# Altium PCB stm32f373-relay-control.PcbDoc (part 2 of 2)
Units mm, origin at the board's own origin, x right, y up, seen from the top; angles counter-clockwise.
Board outline 127.01 x 87.01 mm, 2 copper layers (Top Layer, Bottom Layer), stack 1.571 mm thick; 178 components, 124 nets, 682 pads, 208 vias.
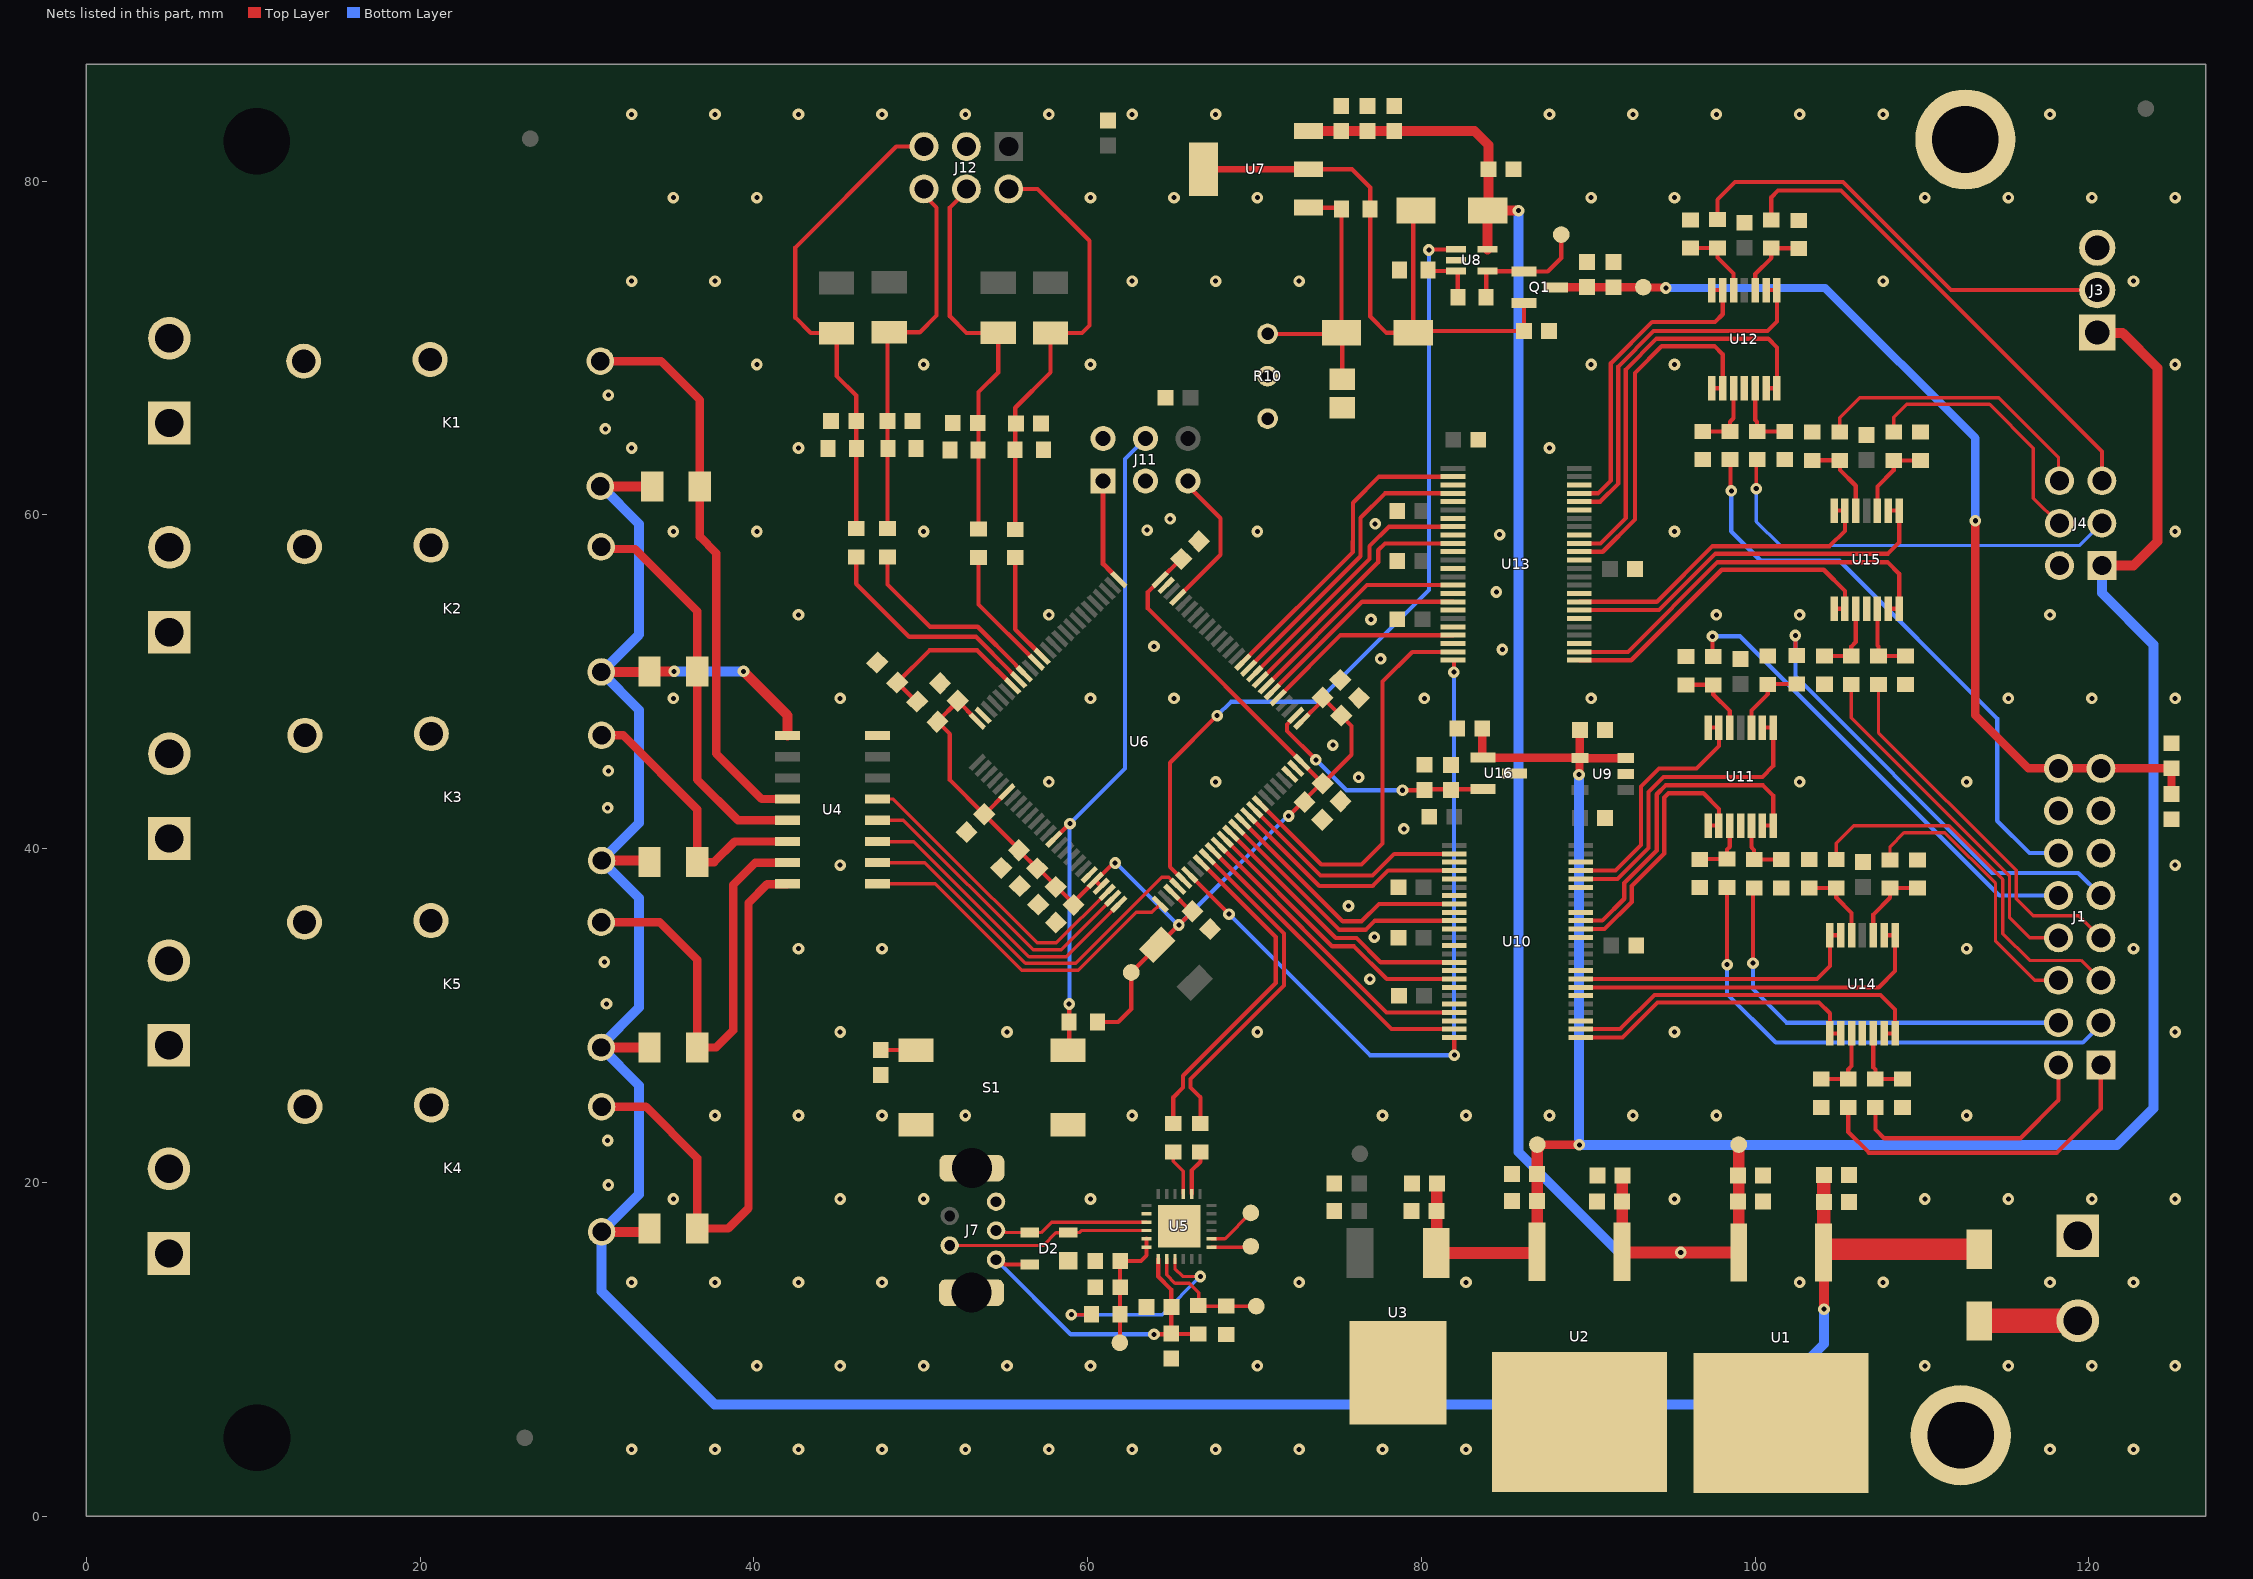
[diagram p2: the nets of this part, all layers, seen from the top]

## Via types
v1: diameter 0.7, hole 0.3, Top Layer to Bottom Layer, tented both sides, 207 vias
v2: diameter 0.7, hole 0.3, Top Layer to Bottom Layer, 1 vias

## Nets (pads, with @x,y where several pads share a name; then routed paths per layer and width w, separated by ;. In a path a pad name is that pad's centre, name@x,y a point inside that pad or via, vN(x,y) a via of type N, cw(c..) or ccw(c..) an arc to the next point about the centre after c; other vN are vias at no path point) (continued)
5V: C8.2 C9.1 C10.1 C11.2 C38.2 C56.2 J3.1 J4.1 TP2.1 U2.3 U3.1 U9.3 U9.4 U16.1 | length 142.7
  Top Layer w0.5: C56.2@83.653,47.197 83.653,45.492 U16.1@83.684,45.461 83.704,45.441 89.483,45.441 U9.4@89.502,45.422 ; TP2.1@87.153,22.254 v1(89.47,22.254) ; v1(89.45,44.436) 89.476,44.463 89.476,45.395 U9.4@89.503,45.421 ; C38.2@89.501,47.102 C38.2@89.501,47.102 U9.4@89.502,45.422 ; U9.3@92.253,45.421 U9.4@89.503,45.421 ; U9.4@89.502,45.422 U9.4@89.503,45.421
  Top Layer w0.6: J3.1@120.503,70.929 120.538,70.895 122.029,70.895 124.112,68.811 124.112,58.4 122.675,56.963 J4.1@120.78,56.963
  Top Layer w0.7: C11.2@80.931,19.929 80.931,15.808 U3.1@80.892,15.769 86.858,15.769 U2.3@86.939,15.85 86.945,15.855 86.945,22.263 87.053,22.154 TP2.1@87.153,22.254
  Bottom Layer w0.6: v1(89.45,44.436) 89.46,44.426 89.46,22.264 v1(89.47,22.254) 121.692,22.254 123.875,24.437 123.875,52.225 120.78,55.32 J4.1@120.78,56.963 ; J3.1@120.325,70.751 J3.1@120.503,70.929
5VFB: U12.13 U12.14 U13.39 | length 25.4
  Top Layer w0.25: U13.39@89.472,58.293 90.735,58.293 92.253,59.811 92.253,68.715 94.1,70.561 100.787,70.561 101.309,70.04 U12.14@101.309,67.593 U12.13@100.659,67.593
12V: C4.2 C5.1 C6.2 C7.1 C32.1 C33.1 C34.1 C37.1 D8.1 TP1.1 U1.3 U2.1 U7.3 U8.5 | length 105.8
  Top Layer w0.6: U7.3@73.241,83.011 73.244,83.008 78.375,83.008 C34.1@78.379,83.004 83.187,83.004 84.027,82.164 C37.1@84.027,80.711 84.027,78.285 D8.1@83.977,78.235 ; U8.5@83.977,75.913 D8.1@83.977,78.235 ; v1(85.823,78.235) D8.1@83.977,78.235
  Top Layer w0.7: U2.1@92.037,15.867 C7.1@92.037,20.399 ; U2.1@92.069,15.8 v1(95.544,15.8) U1.3@99.019,15.8 ; U1.3@99.019,15.8 TP1.1@99.019,22.268
  Bottom Layer w0.6: v1(85.823,78.235) 85.823,21.827 91.85,15.8 v1(95.544,15.8)
24V: C2.1 C3.2 D1.1 D3.1 D4.1 D5.1 D6.1 D7.1 K1.6 K2.6 K3.6 K4.6 K5.6 U1.1 U4.9 | length 179.6
  Top Layer w0.6: K1.6@30.8,61.713 33.883,61.713 D7.1@33.902,61.695 ; K5.6@30.85,28.088 D4.1@33.745,28.088 ; K2.6@30.85,50.588 33.706,50.588 D6.1@33.745,50.627 33.747,50.625 v1(35.225,50.625) ; K4.6@30.875,17.038 33.546,17.038 D3.1@33.745,17.238 ; K3.6@30.875,39.288 33.651,39.288 D5.1@33.745,39.194 ; v1(39.377,50.629) 42.015,47.991 U4.9@42.015,46.782 ; v1(104.125,12.4) 104.134,12.409 U1.1@104.134,17.336
  Top Layer w0.8: U1.1@104.099,15.8 104.117,15.817 104.117,20.419 C3.2@104.134,20.437
  Top Layer w1.3: U1.1@104.241,15.998 D1.1@113.434,15.998
  Bottom Layer w0.6: K1.6@30.8,61.713 30.87,61.713 33.125,59.459 33.125,52.825 30.888,50.588 K2.6@30.85,50.588 33.125,48.313 33.125,41.538 K3.6@30.875,39.288 33.125,37.038 33.125,30.475 30.85,28.2 K5.6@30.85,28.088 33.125,25.813 33.125,19.288 K4.6@30.875,17.038 30.875,13.475 37.65,6.7 100.5,6.7 104.125,10.325 v1(104.125,12.4) ; v1(35.225,50.625) 39.373,50.625 v1(39.377,50.629)
AUX1-IN: J4.3 R25.1 | length 25.6
  Top Layer w0.2: v1(100.069,61.573) 100.069,63.253 R25.1@100.122,63.306
  Bottom Layer w0.2: v1(100.069,61.573) 100.069,59.601 101.499,58.17 119.448,58.17 J4.3@120.78,59.503
AUX1-OUT: U13.32 U15.6 U15.7 | length 19.5
  Top Layer w0.25: U13.32@89.472,54.793 94.107,54.793 97.44,58.126 104.467,58.126 105.384,59.043 U15.6@105.384,60.256 U15.7@104.734,60.256
AUX2-IN: J4.5 R16.1 | length 29.6
  Top Layer w0.25: R16.1@100.972,77.681 100.99,77.7 100.972,77.719 100.972,79.036 101.368,79.433 105.147,79.433 120.78,63.799 J4.5@120.78,62.043
AUX2-OUT: U13.31 U15.1 U15.2 | length 23.4
  Top Layer w0.25: U13.31@89.472,54.293 94.244,54.293 97.627,57.676 107.963,57.676 108.634,58.347 U15.1@108.634,60.256 U15.2@107.984,60.256
AUX3-IN: J4.4 R32.1 | length 15.8
  Top Layer w0.2: R32.1@108.309,64.958 108.309,65.844 109.087,66.622 114.048,66.622 116.676,63.994 116.676,61.007 118.19,59.494 118.232,59.494 J4.4@118.24,59.503
AUX3-OUT: U13.26 U15.13 U15.14 | length 24.4
  Top Layer w0.25: U13.26@89.472,51.793 92.38,51.793 97.753,57.166 107.94,57.166 108.634,56.472 U15.14@108.634,54.38 U15.13@107.984,54.38
AUX4-IN: J4.6 R33.1 | length 17.4
  Top Layer w0.2: R33.1@105.082,64.973 105.082,65.831 106.273,67.022 114.592,67.022 118.181,63.433 118.181,62.102 J4.6@118.24,62.043
AUX4-OUT: U13.25 U15.8 U15.9 | length 20.4
  Top Layer w0.25: U13.25@89.472,51.293 92.577,51.293 98,56.716 104.115,56.716 105.384,55.447 U15.9@105.384,54.38 U15.8@104.734,54.38
CON-IO1: C61.2 D10.2 J12.2 R13.1 R49.1 | length 26.3
  Top Layer w0.254: J12.2@55.275,79.533 57,79.533 60.107,76.426 60.107,71.343 59.665,70.9 D10.2@57.784,70.9 57.784,68.543 55.665,66.423 R13.1@55.665,59.138
CON-IO2: C62.2 D11.2 J12.4 R46.1 R50.1 | length 23.6
  Top Layer w0.254: J12.4@52.735,79.533 52.735,79.418 51.745,78.428 51.745,71.901 52.742,70.904 D11.2@54.647,70.904 54.647,68.539 53.467,67.359 R46.1@53.467,59.143
CON-IO3: C63.2 D12.2 J12.6 R47.1 R51.1 | length 23
  Top Layer w0.254: R47.1@48.014,59.184 C63.2@48.014,65.636 48.014,70.847 D12.2@48.114,70.947 49.947,70.947 50.953,71.952 50.953,78.411 50.195,79.169 J12.6@50.195,79.533
CON-IO4: C64.2 D13.2 J12.5 R48.1 R52.1 | length 29.5
  Top Layer w0.254: R48.1@46.133,59.184 C64.2@46.133,65.63 46.133,67.156 44.961,68.327 D13.2@44.961,70.897 43.41,70.897 42.486,71.822 42.486,76.026 48.533,82.073 J12.5@50.195,82.073
DRIVE1: U4.5 U6.23 | length 18.6
  Top Layer w0.2: U4.5@47.415,42.972 48.365,42.972 51.69,39.646 56.984,34.353 58.134,34.353 U6.23@61.168,37.387
DRIVE2: U4.4 U6.24 | length 18.6
  Top Layer w0.2: U4.4@47.415,41.702 48.96,41.702 56.729,33.933 58.421,33.933 U6.24@61.521,37.034
DRIVE3: U4.3 U6.25 | length 18.6
  Top Layer w0.2: U4.3@47.415,40.432 47.425,40.422 49.588,40.422 56.487,33.523 58.718,33.523 U6.25@61.875,36.68
DRIVE4: U4.1 U6.26 | length 20.7
  Top Layer w0.2: U4.1@47.415,37.892 50.877,37.892 56.046,32.723 59.454,32.723 62.917,36.186 63.856,36.186 U6.26@64.35,36.68
DRIVE5: U4.2 U6.29 | length 22.9
  Top Layer w0.2: U4.2@47.415,39.162 50.238,39.162 56.277,33.123 59.288,33.123 64.447,38.283 64.869,38.283 U6.29@65.41,37.741
GND: C1.1 C2.2 C3.1 C4.1 C5.2 C6.1 C7.2 C8.1 C9.2 C10.2 C11.1 C12.2 C13.1 C14.1 C15.1 C16.1 C17.2 C18.1 C19.1 C20.1 C21.1 C22.1 C23.1 C24.1 C25.1 C26.1 C27.1 C28.1 C29.1 C30.1 C31.1 C32.2 C33.2 C34.2 C35.2 C36.2 C37.2 C38.1 C39.2 C40.2 C41.2 C42.2 C43.1 C44.1 C45.1 C46.1 C47.1 C48.1 C49.1 C50.1 C51.1 C52.1 C53.2 C54.2 C55.1 C56.1 C57.2 C58.2 C59.1 C60.1 C61.1 C62.1 C63.1 C64.1 D2.1 J1.11 J1.13 J1.14 J2.1 J3.3 J4.2 J7.5 J7.MP1 J7.MP2 J11.2 J11.3 J12.3 pad.MH@112.6,82.5 pad.MH@112.326,4.85 R2.2 R7.1 R10.2 R10.3 R12.2 R18.2 R19.2 R20.2 R21.2 R26.2 R27.2 R28.2 R29.2 R34.2 R35.2 R36.2 R37.2 R42.2 R43.2 R44.2 R45.2 R49.2 R50.2 R51.2 R52.2 S1.2 S1.2_1 U1.2 U2.2 U3.2 U4.8 U5.2 U5.25 U6.20 U6.48 U6.49 U6.74 U6.99 U8.2 U9.2 U10.3 U10.5 U10.7 U10.9 U10.11 U10.13 U10.16 U10.18 U10.20 U10.22 U10.27 U10.30 U10.33 U10.37 U10.40 U10.43 U10.46 U11.11 U12.11 U13.3 U13.5 U13.7 U13.9 U13.11 U13.13 U13.16 U13.18 U13.20 U13.22 U13.27 U13.30 U13.33 U13.37 U13.40 U13.43 U13.46 U14.11 U15.11 U16.3
  other v1: 32.675,4.009 37.675,4.009 42.675,4.009 47.675,4.009 52.675,4.009 57.675,4.009 62.675,4.009 67.675,4.009 72.675,4.009 77.675,4.009 82.675,4.009 117.675,4.009 122.675,4.009 40.175,9.009 45.175,9.009 50.175,9.009 55.175,9.009 60.175,9.009 70.175,9.009 110.175,9.009 115.175,9.009 120.175,9.009 125.175,9.009 32.675,14.009 37.675,14.009 42.675,14.009 47.675,14.009 72.675,14.009 82.675,14.009 102.675,14.009 107.675,14.009 117.675,14.009 122.675,14.009 35.175,19.009 45.175,19.009 50.175,19.009 60.175,19.009 95.175,19.009 110.175,19.009 115.175,19.009 120.175,19.009 125.175,19.009 31.281,19.846 31.236,22.51 37.675,24.009 42.675,24.009 47.675,24.009 52.675,24.009 62.675,24.009 77.675,24.009 82.675,24.009 87.675,24.009 92.675,24.009 97.675,24.009 112.675,24.009 45.175,29.009 55.175,29.009 70.175,29.009 95.175,29.009 125.175,29.009 31.17,30.702 76.909,32.184 31.036,33.211 42.675,34.009 47.675,34.009 112.675,34.009 122.675,34.009 77.181,34.692 75.637,36.567 45.175,39.009 125.175,39.009 78.951,41.186 31.236,42.447 57.675,44.009 67.675,44.009 102.675,44.009 112.675,44.009 76.241,44.27 31.281,44.667 74.691,46.198 35.175,49.009 45.175,49.009 60.175,49.009 65.175,49.009 80.175,49.009 90.175,49.009 115.175,49.009 120.175,49.009 125.175,49.009 77.564,51.371 84.851,51.939 63.977,52.121 76.985,53.737 42.675,54.009 57.675,54.009 97.675,54.009 102.675,54.009 117.675,54.009 84.495,55.377 84.697,58.814 35.175,59.009 40.175,59.009 50.175,59.009 70.175,59.009 95.175,59.009 125.175,59.009 63.566,59.085 77.23,59.466 64.947,59.761 32.675,64.009 42.675,64.009 87.675,64.009 31.103,65.159 31.281,67.179 40.175,69.009 50.175,69.009 60.175,69.009 90.175,69.009 95.175,69.009 125.175,69.009 32.675,74.009 37.675,74.009 62.675,74.009 67.675,74.009 72.675,74.009 107.675,74.009 122.675,74.009 35.175,79.009 40.175,79.009 60.175,79.009 65.175,79.009 70.175,79.009 90.175,79.009 95.175,79.009 110.175,79.009 115.175,79.009 120.175,79.009 125.175,79.009 32.675,84.009 37.675,84.009 42.675,84.009 47.675,84.009 52.675,84.009 57.675,84.009 62.675,84.009 67.675,84.009 87.675,84.009 92.675,84.009 97.675,84.009 102.675,84.009 107.675,84.009 117.675,84.009
GPIO1: R13.2 U6.89 | length 6.6
  Top Layer w0.254: R13.2@55.665,57.438 55.665,53.143 U6.89@57.279,51.53
GPIO2: R46.2 U6.90 | length 7.7
  Top Layer w0.254: R46.2@53.467,57.443 53.467,54.634 U6.90@56.925,51.176
GPIO3: R47.2 U6.92 | length 12.1
  Top Layer w0.254: R47.2@48.014,57.484 48.014,55.836 50.552,53.297 53.416,53.297 55.706,51.007 55.706,50.981 U6.92@56.218,50.469
GPIO4: R48.2 U6.93 | length 13.7
  Top Layer w0.254: R48.2@46.133,57.484 46.133,55.87 49.306,52.696 53.31,52.696 55.353,50.653 55.353,50.627 U6.93@55.864,50.115
NetC35_1: C35.1 D8.2 D9.1 Q1.2 R9.2 U7.2 U7.2_1 | length 36.9
  Top Layer w0.25: U7.2@73.241,80.711 75.844,80.711 76.935,79.62 76.935,71.884 77.907,70.912 D9.1@79.512,70.912 ; D8.2@79.677,78.235 79.512,78.069 D9.1@79.512,70.912 ; Q1.2@86.142,72.685 86.154,72.672 C35.1@86.154,71.011 79.611,71.011 D9.1@79.512,70.912
  Top Layer w0.4: U7.2_1@66.941,80.711 U7.2@73.241,80.711
NetC36_1: C36.1 D9.2 R9.1 R10.1 U7.1 | length 16.7
  Top Layer w0.25: R10.1@70.787,70.851 75.151,70.851 D9.2@75.212,70.912 D9.2@75.216,70.908 ; U7.1@73.241,78.411 75.141,78.411 R9.1@75.216,78.336 D9.2@75.216,70.908 ; C36.1@75.261,68.126 75.261,70.637 75.216,70.681 D9.2@75.216,70.908
NetD1_2: D1.2 J2.2 | length 5.9
  Top Layer w1.2: J2.2@119.322,11.698 J2.2@119.337,11.713
  Top Layer w1.45: D1.2@113.434,11.698 113.442,11.705 119.314,11.705 J2.2@119.322,11.698
NetD2_2: D2.2 J7.2 U5.4 | length 12.2
  Top Layer w0.2: J7.2@51.735,16.219 57.349,16.219 58.106,16.976 58.816,16.976 D2.2@58.834,16.994 59.511,16.994 59.636,17.119 U5.4@63.534,17.119
NetD2_3: D2.3 J7.3 U5.3 | length 9.3
  Top Layer w0.2: J7.3@54.518,17.119 54.643,16.994 D2.3@56.534,16.994 57.211,16.994 57.838,17.621 59.519,17.621 59.521,17.619 U5.3@63.534,17.619
NetJ11_1: J11.1 U6.76 | length 6.3
  Top Layer w0.254: 61.424,56.577 U6.76@61.875,56.126
  Top Layer w0.3: J11.1@60.932,62.035 60.932,57.069 61.424,56.577
NetJ11_5: J11.5 U6.72 | length 8.8
  Top Layer w0.254: U6.72@65.41,55.065 67.957,57.612 67.957,59.804 66.012,61.749 J11.5@66.012,62.035
NetQ1_1: Q1.1 R11.1 TP6.1 U8.4 | length 7.8
  Top Layer w0.25: R11.1@83.886,73.046 83.886,74.538 83.961,74.613 U8.4@83.977,74.613 83.991,74.599 86.128,74.599 Q1.1@86.142,74.585 87.574,74.585 88.383,75.394 TP6.1@88.383,76.8
NetR3_1: R3.1 U6.33 | length 20
  Top Layer w0.25: R3.1@65.134,23.519 65.134,25.1 65.725,25.691 65.725,26.389 71.277,31.941 71.277,34.703 U6.33@66.825,39.155
NetR3_2: R3.2 U5.21 | length 2.7
  Top Layer w0.2: R3.2@65.134,21.819 65.134,21.269 65.734,20.669 U5.21@65.734,19.319
NetR4_2: R4.2 U5.9 | length 12.2
  Top Layer w0.2: v1(59.025,12.075) 60.208,12.075 R4.2@60.234,12.101 ; U5.9@65.234,15.419 65.234,14.824 65.693,14.365 v1(66.759,14.365)
  Bottom Layer w0.2: v1(59.025,12.075) 64.469,12.075 v1(66.759,14.365)
NetR5_1: R5.1 U6.34 | length 20.5
  Top Layer w0.25: R5.1@66.759,23.519 66.759,25.1 66.175,25.684 66.175,26.203 71.774,31.802 71.774,34.913 U6.34@67.178,39.509
NetR5_2: R5.2 U5.20 | length 2.7
  Top Layer w0.254: U5.20@66.234,19.319 66.234,20.717 66.759,21.242 R5.2@66.759,21.819
NetR6_1: R6.1 R7.2 U6.94 | length 10.3
  Top Layer w0.254: R6.1@49.795,48.812 49.731,48.812 R7.2@48.592,49.952 50.523,51.883 53.39,51.883 U6.94@55.511,49.762
NetR11_2: R11.2 R12.1 U8.3 | length 3.3
  Top Layer w0.25: R12.1@80.393,74.671 80.451,74.613 U8.3@82.077,74.613 82.111,74.613 82.186,74.538 R11.2@82.186,73.046
NetR14_2: R14.2 R18.1 U11.3 | length 4.7
  Top Layer w0.25: U11.3@99.784,47.256 99.784,48.287 100.762,49.265 R18.1@100.762,49.84 100.787,49.865 R14.2@102.487,49.865
NetR15_2: R15.2 R19.1 U11.5 | length 4.6
  Top Layer w0.25: R19.1@95.864,49.813 95.872,49.821 R15.2@97.493,49.821 97.493,49.246 98.484,48.254 U11.5@98.484,47.256
NetR16_2: R16.2 R20.1 U12.3 | length 4.6
  Top Layer w0.25: U12.3@100.009,73.469 100.009,74.443 100.972,75.406 R16.2@100.972,75.981 102.597,75.981 R20.1@102.622,75.956
NetR17_2: R17.2 R21.1 U12.5 | length 4.5
  Top Layer w0.25: R21.1@96.131,75.981 96.146,75.996 R17.2@97.745,75.996 97.745,75.421 98.709,74.458 U12.5@98.709,73.469
NetR22_2: R22.2 R26.1 U11.10 | length 3.7
  Top Layer w0.25: R26.1@96.681,39.36 96.694,39.373 R22.2@98.318,39.373 98.318,39.948 98.484,40.114 U11.10@98.484,41.38
NetR23_2: R23.2 R27.1 U11.12 | length 3.7
  Top Layer w0.25: U11.12@99.784,41.38 99.784,40.084 99.941,39.927 R23.2@99.941,39.352 R27.1@101.566,39.352
NetR24_2: R24.2 R28.1 U12.10 | length 4.3
  Top Layer w0.25: R28.1@96.872,65.006 R24.2@98.497,65.006 98.497,65.581 98.709,65.793 U12.10@98.709,67.593
NetR25_2: R25.2 R29.1 U12.12 | length 4.3
  Top Layer w0.25: U12.12@100.009,67.593 100.009,65.694 100.122,65.581 R25.2@100.122,65.006 R29.1@101.772,65.006
NetR30_2: R30.2 R34.1 U14.3 | length 4.9
  Top Layer w0.25: U14.3@107.084,34.806 107.084,36.057 108.085,37.058 R30.2@108.085,37.633 R34.1@109.735,37.633
NetR31_2: R31.2 R35.1 U14.5 | length 4.8
  Top Layer w0.25: R35.1@103.24,37.643 R31.2@104.865,37.643 104.865,37.068 105.784,36.149 U14.5@105.784,34.806
NetR32_2: R32.2 R36.1 U15.3 | length 5
  Top Layer w0.25: R32.2@108.309,63.258 109.903,63.258 R36.1@109.913,63.267
  Top Layer w0.254: U15.3@107.334,60.256 107.334,61.706 108.309,62.681 R32.2@108.309,63.258
NetR33_2: R33.2 R37.1 U15.5 | length 5.1
  Top Layer w0.25: R37.1@103.432,63.273 R33.2@105.082,63.273 105.082,62.698 106.034,61.746 U15.5@106.034,60.256
NetR38_2: R38.2 R42.1 U14.10 | length 4.4
  Top Layer w0.25: R42.1@103.959,26.193 R38.2@105.584,26.193 105.584,26.768 105.784,26.968 U14.10@105.784,28.93
NetR39_2: R39.2 R43.1 U14.12 | length 4.4
  Top Layer w0.25: U14.12@107.084,28.93 107.084,26.893 107.209,26.768 R39.2@107.209,26.193 R43.1@108.834,26.193
NetR40_2: R40.2 R44.1 U15.10 | length 4.6
  Top Layer w0.25: R44.1@104.155,51.552 104.164,51.543 R40.2@105.766,51.543 105.766,52.118 106.034,52.386 U15.10@106.034,54.38
NetR41_2: R41.2 R45.1 U15.12 | length 4.5
  Top Layer w0.25: R41.2@107.391,51.543 R45.1@109.012,51.543
  Top Layer w0.254: U15.12@107.334,54.38 107.334,52.177 107.391,52.12 R41.2@107.391,51.543
NetRX1_1: RX1.1 U5.13 | length 2.4
  Top Layer w0.2: U5.13@67.434,16.119 69.734,16.119 RX1.1@69.784,16.169
NetTX1_1: TX1.1 U5.14 | length 3
  Top Layer w0.2: U5.14@67.434,16.619 68.234,16.619 TX1.1@69.784,18.169
NetU6_30: U6.30 U8.1 | length 49.2
  Top Layer w0.25: U6.30@65.764,38.095 64.947,38.911 64.947,45.149 v1(67.766,47.968) ; v1(80.451,75.879) 80.468,75.896 82.06,75.896 U8.1@82.077,75.913
  Bottom Layer w0.25: v1(67.766,47.968) 68.598,48.8 73.75,48.8 80.451,55.501 v1(80.451,75.879)
NRST: C21.2 J11.4 R8.2 S1.1 S1.1_1 U6.14 | length 42.1
  Top Layer w0.25: C21.2@47.603,27.933 49.694,27.933 S1.1@49.717,27.91 ; U6.14@57.986,40.569 58.003,40.569 58.933,41.5 v1(58.95,41.5) ; S1.1_1@58.817,27.91 58.899,27.992 R8.2@58.899,29.617 v1(58.899,30.686)
  Bottom Layer w0.25: v1(58.899,30.686) 58.925,30.712 58.925,41.475 v1(58.95,41.5) 62.25,44.8 62.25,63.353 J11.4@63.472,64.575
PRESSURE-IN: J3.2 R17.1 | length 27.1
  Top Layer w0.25: R17.1@97.745,77.696 97.745,78.891 98.801,79.946 105.27,79.946 111.747,73.469 J3.2@120.503,73.469
PRESSURE-OUT: U12.8 U12.9 U13.38 | length 21.7
  Top Layer w0.25: U13.38@89.472,57.793 90.871,57.793 92.806,59.728 92.806,68.514 94.404,70.111 97.572,70.111 98.059,69.624 U12.9@98.059,67.593 U12.8@97.409,67.593
Relay1: D7.2 K1.1 U4.12 | length 33.9
  Top Layer w0.5: K1.1@30.8,69.213 34.432,69.213 36.762,66.884 D7.2@36.762,61.695 36.762,58.693 37.744,57.711 37.744,45.699 40.471,42.972 U4.12@42.015,42.972
Relay2: D6.2 K2.1 U4.13 | length 23.9
  Top Layer w0.5: K2.1@30.85,58.088 30.977,57.961 32.875,57.961 36.605,54.231 D6.2@36.605,50.627 36.605,44.148 39.05,41.702 U4.13@42.015,41.702
Relay3: D5.2 K3.1 U4.14 | length 16.7
  Top Layer w0.5: K3.1@30.875,46.788 30.887,46.8 32.166,46.8 36.605,42.361 D5.2@36.605,39.194 37.618,39.194 38.856,40.432 U4.14@42.015,40.432
Relay4: D3.2 K4.1 U4.16 | length 35.9
  Top Layer w0.5: K4.1@30.875,24.538 33.532,24.538 36.605,21.465 D3.2@36.605,17.238 38.467,17.238 39.682,18.453 39.682,36.752 40.797,37.867 41.99,37.867 U4.16@42.015,37.892
Relay5: D4.2 K5.1 U4.15 | length 27
  Top Layer w0.5: K5.1@30.85,35.588 34.363,35.588 36.605,33.346 D4.2@36.605,28.088 37.744,28.088 38.762,29.107 38.762,37.832 40.093,39.162 U4.15@42.015,39.162
RELAYCON1: J5.1 K4.4
RELAYCON2: J5.2 K4.3
RELAYCON3: J6.1 K5.4
RELAYCON4: J6.2 K5.3
RELAYCON5: J8.1 K3.4
RELAYCON6: J8.2 K3.3
RELAYCON7: J9.1 K2.4
RELAYCON8: J9.2 K2.3
RELAYCON9: J10.1 K1.4
RELAYCON10: J10.2 K1.3
SDADC11: U6.38 U10.15 | length 16.6
  Top Layer w0.254: U6.38@68.592,40.923 74.869,34.647 76.106,34.647 77.566,33.186 U10.15@81.971,33.186
SDADC12: U6.39 U10.10 | length 15.8
  Top Layer w0.254: U6.39@68.946,41.277 75.076,35.147 76.673,35.147 77.213,35.686 U10.10@81.971,35.686
SDADC13: U6.40 U10.8 | length 15.6
  Top Layer w0.254: U6.40@69.299,41.63 75.283,35.647 76.421,35.647 77.46,36.686 U10.8@81.971,36.686
SDADC14: U6.41 U10.4 | length 14.5
  Top Layer w0.254: U6.41@69.653,41.984 73.878,37.759 77.083,37.759 78.011,38.686 U10.4@81.971,38.686
SDADC15: U6.42 U10.2 | length 14.1
  Top Layer w0.254: U6.42@70.007,42.337 73.959,38.385 77.068,38.385 78.369,39.686 U10.2@81.971,39.686
SDADC16: U6.43 U13.23 | length 24
  Top Layer w0.25: U6.43@70.36,42.691 74.001,39.05 76.423,39.05 77.673,40.3 77.673,50.009 79.457,51.793 U13.23@81.896,51.793
SDADC17: U6.35 U10.23 | length 18.9
  Top Layer w0.254: U6.35@67.532,39.862 78.208,29.186 U10.23@81.971,29.186
SDADC18: U6.36 U10.21 | length 18.2
  Top Layer w0.254: U6.36@67.885,40.216 77.915,30.186 U10.21@81.971,30.186
SDADC19: U6.37 U10.17 | length 17.2
  Top Layer w0.254: U6.37@68.239,40.569 74.661,34.147 75.964,34.147 77.924,32.186 U10.17@81.971,32.186
SDADC31: U6.55 U13.21 | length 12
  Top Layer w0.254: U6.55@71.421,49.055 75.159,52.793 U13.21@81.896,52.793
SDADC32: U6.56 U13.17 | length 13.1
  Top Layer w0.254: U6.56@71.067,49.408 76.452,54.793 U13.17@81.896,54.793
SDADC33: U6.57 U13.15 | length 13.7
  Top Layer w0.254: U6.57@70.714,49.762 76.745,55.793 U13.15@81.896,55.793
SDADC34: U6.58 U13.10 | length 15.3
  Top Layer w0.254: U6.58@70.36,50.115 77.411,57.166 77.411,57.884 77.815,58.288 78.192,58.288 78.197,58.293 U13.10@81.896,58.293
SDADC35: U6.59 U13.8 | length 16
  Top Layer w0.254: U6.59@70.007,50.469 76.9,57.363 76.9,58.126 78.067,59.293 U13.8@81.896,59.293
SDADC36: U6.60 U13.4 | length 17.9
  Top Layer w0.254: U6.60@69.653,50.822 76.354,57.524 76.354,59.832 77.815,61.293 U13.4@81.896,61.293
SDADC37: U6.61 U13.2 | length 18.9
  Top Layer w0.254: U6.61@69.299,51.176 75.896,57.773 75.896,58.41 ; 75.9,58.41 75.9,60.73 77.463,62.293 U13.2@81.896,62.293
SELECT: U6.31 U10.24 U13.24 | length 45.1
  Top Layer w0.25: U6.31@66.118,38.448 66.118,38.44 68.475,36.083 v1(68.475,36.075) ; U13.24@81.896,51.293 81.925,51.293 81.95,51.268 v1(81.95,50.575) ; U10.24@81.971,28.686 81.975,28.683 v1(81.975,27.625)
  Bottom Layer w0.25: v1(68.475,36.075) 76.925,27.625 v1(81.975,27.625) 81.963,27.637 81.963,50.562 v1(81.95,50.575)
SENSOR0: U10.45 U11.6 U11.7 | length 15.2
  Top Layer w0.25: U10.45@89.547,38.686 91.626,38.686 93.157,40.217 93.157,43.724 94.245,44.812 96.488,44.812 97.834,46.158 U11.6@97.834,47.256 U11.7@97.184,47.256
SENSOR0-IN: J1.1 R38.1 | length 20.8
  Top Layer w0.254: R38.1@105.584,24.493 105.584,23.015 106.816,21.783 118.083,21.783 120.72,24.42 J1.1@120.72,27.032
SENSOR1: U10.44 U11.1 U11.2 | length 19.3
  Top Layer w0.25: U10.44@89.547,38.186 91.763,38.186 93.607,40.031 93.607,43.398 94.509,44.3 99.816,44.3 99.822,44.294 100.434,44.294 101.084,44.944 U11.1@101.084,47.256 U11.2@100.434,47.256
SENSOR1-IN: J1.3 R22.1 | length 30.5
  Top Layer w0.254: R22.1@98.318,37.673 98.322,37.669 v1(98.322,33.048)
  Bottom Layer w0.254: v1(98.322,33.048) 98.322,31.297 101.236,28.383 119.64,28.383 120.72,29.462 J1.3@120.72,29.572
SENSOR2: U10.39 U11.13 U11.14 | length 20.1
  Top Layer w0.25: U10.39@89.547,35.686 90.844,35.686 92.157,37 92.157,37.945 94.107,39.895 94.107,43.262 94.641,43.796 100.477,43.796 101.084,43.189 U11.14@101.084,41.38 U11.13@100.434,41.38
SENSOR2-IN: J1.5 R31.1 | length 23
  Top Layer w0.2: R31.1@104.865,39.343 104.865,40.329 105.917,41.381 111.62,41.381 114.848,38.153 114.848,34.909 116.457,33.3 119.532,33.3 J1.5@120.72,32.112
SENSOR3: U10.38 U11.8 U11.9 | length 16.2
  Top Layer w0.25: U10.38@89.547,35.186 90.981,35.186 92.607,36.813 92.607,37.759 94.557,39.708 94.557,43.075 94.804,43.323 96.896,43.323 97.834,42.384 U11.9@97.834,41.38 U11.8@97.184,41.38
SENSOR3-IN: J1.7 R41.1 | length 22.3
  Top Layer w0.2: R41.1@107.391,49.843 107.391,46.956 115.648,38.699 115.648,37 116.676,35.972 119.4,35.972 J1.7@120.72,34.652
SENSOR4: U10.32 U14.6 U14.7 | length 17.7
  Top Layer w0.25: U10.32@89.547,32.186 103.7,32.186 104.484,32.971 U14.7@104.484,34.806 U14.6@105.134,34.806
SENSOR4-IN: J1.9 R14.1 | length 27.5
  Top Layer w0.25: v1(102.411,52.775) 102.411,51.893 102.285,51.767 R14.1@102.487,51.565
  Bottom Layer w0.25: v1(102.411,52.775) 102.411,50.339 114.205,38.545 119.367,38.545 J1.9@120.72,37.192
SENSOR5: U10.31 U14.1 U14.2 | length 22
  Top Layer w0.25: U10.31@89.547,31.686 107.409,31.686 108.384,32.661 U14.1@108.384,34.806 U14.2@107.734,34.806
SENSOR5-IN: J1.2 R39.1 | length 15.6
  Top Layer w0.254: R39.1@107.209,24.493 107.209,23.176 107.734,22.651 115.901,22.651 118.18,24.93 J1.2@118.18,27.032
SENSOR6: U10.26 U14.13 U14.14 | length 22.1
  Top Layer w0.25: U10.26@89.547,29.186 91.915,29.186 93.965,31.236 107.515,31.236 108.384,30.368 U14.14@108.384,28.93 U14.13@107.734,28.93
SENSOR6-IN: J1.4 R23.1 | length 25.2
  Top Layer w0.254: v1(99.872,33.137) 99.872,37.584 R23.1@99.941,37.652
  Bottom Layer w0.254: v1(99.872,33.137) 99.872,31.588 101.888,29.572 J1.4@118.18,29.572
SENSOR7: U10.25 U14.8 U14.9 | length 17.9
  Top Layer w0.25: U10.25@89.547,28.686 92.051,28.686 94.151,30.786 103.832,30.786 104.484,30.134 U14.8@104.484,28.93 U14.9@105.134,28.93
SENSOR7-IN: J1.6 R30.1 | length 16.9
  Top Layer w0.2: R30.1@108.085,39.333 108.085,40.125 108.921,40.961 111.364,40.961 114.409,37.916 114.409,34.448 116.745,32.112 J1.6@118.18,32.112
SENSOR8: U12.6 U12.7 U13.45 | length 19.2
  Top Layer w0.25: U13.45@89.472,61.293 90.585,61.293 91.353,62.062 91.353,69.087 93.833,71.567 97.604,71.567 98.059,72.022 U12.6@98.059,73.469 U12.7@97.409,73.469
SENSOR8-IN: J1.8 R40.1 | length 21.3
  Top Layer w0.2: R40.1@105.766,49.843 105.766,47.836 115.248,38.354 115.248,35.861 116.457,34.652 J1.8@118.18,34.652
SENSOR9: U12.1 U12.2 U13.44 | length 23
  Top Layer w0.25: U13.44@89.472,60.793 90.721,60.793 91.803,61.875 91.803,68.901 93.913,71.011 100.737,71.011 101.309,71.583 U12.1@101.309,73.469 U12.2@100.659,73.469
SENSOR9-IN: J1.10 R15.1 | length 28.4
  Top Layer w0.254: v1(97.447,52.725) 97.447,51.566 R15.1@97.493,51.521
  Bottom Layer w0.254: v1(97.447,52.725) 99.1,52.725 114.633,37.192 J1.10@118.18,37.192
SENSOR-5V: C53.1 C54.1 C57.1 C58.1 J1.15 J1.16 Q1.3 TP5.1 | length 60.1
  Top Layer w0.5: Q1.3@88.042,73.635 88.049,73.642 91.509,73.642 93.298,73.642 TP5.1@93.305,73.65 93.33,73.625 94.625,73.625 v1(94.65,73.6) ; v1(113.2,59.65) 113.2,47.986 116.374,44.812 J1.16@118.18,44.812 118.181,44.814 124.951,44.814 C58.1@124.952,44.815 C57.1@124.952,43.265
  Bottom Layer w0.5: v1(94.65,73.6) 104.2,73.6 113.2,64.6 v1(113.2,59.65)
SENSOR-5V-FB: J1.12 R24.1 | length 35.5
  Top Layer w0.254: R24.1@98.497,63.306 98.525,63.278 98.525,61.485 v1(98.571,61.439)
  Bottom Layer w0.254: v1(98.571,61.439) 98.571,59.014 100.335,57.25 105.05,57.25 114.505,47.795 114.505,41.67 116.444,39.732 J1.12@118.18,39.732
VBUS: R1.2 R2.1 U5.8 VBUS.1 | length 7.6
  Top Layer w0.2: U5.8@64.734,15.419 64.734,14.468 65.237,13.965 66.094,13.965 66.665,13.394 66.665,12.65 R1.2@66.634,12.619 66.665,12.588 VBUS.1@70.105,12.588
VCC-5V: C15.2 C16.2 D2.4 J7.1 R1.1 U5.7 | length 20.9
  Top Layer w0.25: J7.1@54.518,15.369 54.748,15.369 55.043,15.074 D2.4@56.534,15.074 ; v1(63.975,10.9) 64.965,10.9 C16.2@65.009,10.944 ; U5.7@64.234,15.419 64.234,14.367 65.009,13.592 C16.2@65.009,10.944 ; R1.1@66.634,10.919 65.034,10.919 C16.2@65.009,10.944
  Bottom Layer w0.25: J7.1@54.518,15.369 58.987,10.9 v1(63.975,10.9)
VDD: C17.1 C18.2 C19.2 C20.2 C22.2 C23.2 C24.2 C25.2 C26.2 C27.2 C28.2 C29.2 L1.2 R6.2 R8.1 TP4.1 U6.6 U6.21 U6.22 U6.28 U6.50 U6.51 U6.75 U6.100 | length 79.9
  Top Layer w0.254: U6.100@53.419,47.641 U6.100@53.39,47.641 53.39,47.67 52.823,48.236 52.823,48.252 C17.1@52.218,48.858 52.218,48.831 R6.2@50.997,47.61 51.745,46.863 51.745,44.118 C20.2@53.806,42.056 ; U6.6@55.157,43.398 53.815,42.056 C20.2@53.806,42.056 ; C23.2@55.889,39.902 55.889,39.898 C22.2@56.981,38.806 ; C23.2@55.927,39.936 C20.2@53.806,42.056 ; C22.2@57.018,38.844 59.158,36.704 59.158,36.792 U6.21@60.461,38.095 ; C28.2@59.077,36.711 C28.2@59.158,36.629 ; R8.1@60.599,29.617 61.836,29.617 62.616,30.397 TP4.1@62.616,32.58 v1(65.465,35.43) C19.2@66.28,36.244 66.2,36.244 U6.28@65.057,37.387 ; U6.22@60.814,37.741 U6.21@60.461,38.095 ; v2(61.648,39.143) 61.545,39.143 60.497,38.095 U6.21@60.461,38.095 ; C18.2@65.61,57.363 65.587,57.363 U6.75@64.35,56.126 63.611,55.387 63.611,54.39 U6.50@72.835,45.166 74.095,43.906 75.821,45.632 75.821,47.349 C26.2@75.198,47.972 75.158,47.972 C27.2@74.08,49.05 74.08,48.886 U6.51@72.835,47.641 ; v1(72.05,41.956) 73.906,43.812 C25.2@74.095,43.812
  Bottom Layer w0.254: v2(61.648,39.143) 61.7,39.143 65.413,35.43 v1(65.465,35.43) 71.982,41.947 72.041,41.947 v1(72.05,41.956)
VDD_3V3: C13.2 C14.2 R4.1 U5.5 U5.6 VDD.1 | length 7.6
  Top Layer w0.25: VDD.1@61.934,10.395 R4.1@61.934,12.101 61.934,15.269 C13.2@61.959,15.294 63.197,15.294 63.534,15.631 U5.6@63.534,16.119 U5.5@63.534,16.619
VREFSD+: C30.2 C31.2 U6.52 U16.2 | length 14.4
  Top Layer w0.25: U6.52@72.481,47.994 72.481,47.968 71.956,47.443 71.956,47.05 v1(73.679,45.327) ; v1(78.875,43.5) 80.163,43.5 C31.2@80.188,43.525 80.224,43.561 U16.2@83.684,43.561
  Bottom Layer w0.25: v1(73.679,45.327) 75.506,43.5 v1(78.875,43.5)
pads on no net: FID1.F1 FID2.F1 FID3.F1 J7.4 U4.6 U4.7 U4.10 U4.11 U5.1 U5.10 U5.11 U5.12 U5.15 U5.16 U5.17 U5.18 U5.19 U5.22 U5.23 U5.24 U6.1 U6.2 U6.3 U6.4 U6.5 U6.7 U6.8 U6.9 U6.10 U6.11 U6.12 U6.13 U6.15 U6.16 U6.17 U6.18 U6.19 U6.27 U6.32 U6.44 U6.45 U6.46 U6.47 U6.53 U6.54 U6.62 U6.63 U6.64 U6.65 U6.66 U6.67 U6.68 U6.69 U6.70 U6.71 U6.73 U6.77 U6.78 U6.79 U6.80 U6.81 U6.82 U6.83 U6.84 U6.85 U6.86 U6.87 U6.88 U6.91 U6.95 U6.96 U6.97 U6.98 U9.1 U10.14 U13.14

## Polygon pours and split planes (outlines as drawn)
GND on Bottom Layer "Bottom Layer-GND" (solid, remove dead copper, pour order 36): 29.824,0 127,0 127.004,86.996 29.826,86.995
RELAYCON1 on Bottom Layer "RELAYCON1_L02_P028" (solid, pour order 28): 21.854,25.543 21.871,12.593 0.525,12.593 0.525,17.968 15.917,17.968 15.917,25.543
RELAYCON3 on Bottom Layer "RELAYCON3_L02_P027" (solid, pour order 27): 22.037,36.674 22.052,26.079 0.525,26.079 0.525,30.593 16.101,30.593 16.101,36.674
RELAYCON5 on Bottom Layer "RELAYCON5_L02_P026" (solid, pour order 26): 21.737,48.193 21.751,37.818 0.525,37.818 0.525,42.518 16.5,42.518 16.5,48.193
RELAYCON7 on Bottom Layer "RELAYCON7_L02_P025" (solid, pour order 25): 21.784,59.743 21.798,49.558 0.544,49.558 0.544,54.345 15.846,54.345 15.846,59.743
RELAYCON9 on Bottom Layer "RELAYCON9_L02_P022" (solid, pour order 22): 21.767,73.443 21.783,61.956 0.525,61.956 0.525,66.743 15.83,66.743 15.83,73.443
GND on Top Layer "Top Layer-GND" (solid, remove dead copper, pour order 35): 29.849,0 127,0 127.004,86.996 29.851,86.995
RELAYCON2 on Top Layer "RELAYCON2_L01_P032" (solid, pour order 32): 0.55,25.346 16.6,25.346 16.6,19.046 0.55,19.046
RELAYCON4 on Top Layer "RELAYCON4_L01_P031" (solid, pour order 31): 0.284,36.904 16.334,36.904 16.334,30.604 0.284,30.604
RELAYCON6 on Top Layer "RELAYCON6_L01_P030" (solid, pour order 30): 0.55,48.866 16.6,48.866 16.6,42.566 0.55,42.566
RELAYCON8 on Top Layer "RELAYCON8_L01_P029" (solid, pour order 29): 0.55,61.34 16.6,61.34 16.6,55.04 0.55,55.04
RELAYCON10 on Top Layer "RELAYCON10_L01_P017" (solid, pour order 17): 0.55,73.468 16.6,73.468 16.6,67.168 0.55,67.168

## Keep-outs
Keep-Out Layer:
  lines w0.1: -0.005,0.004 -0.005,87.004 ; 0,0 127,0 ; 0.001,86.995 127.001,86.995 ; 127.004,-0.004 127.004,86.996

## Silkscreen, mask and mechanical layers (free items; w line width, h text height)
Top Overlay:
  circle w0.3: c112.672,82.468 r4
  circle w0.3: c112.385,4.85 r4
  circle w0.3: c10.234,4.693 r3
  circle w0.3: c10.209,82.393 r3
  lines w0.127: 110.654,24.723 113.854,24.723 113.854,44.709 110.654,44.709 ; 110.679,24.718 110.679,44.693 ; 108.661,10.045 108.661,17.643 111.209,17.643 111.209,10.045 108.661,10.045 ; 110.735,53.746 110.735,65.161 114.135,65.161 114.135,53.746 110.735,53.746 ; 111.702,69.973 111.702,77.698 114.127,77.698 114.127,69.973 111.702,69.973
  text "230VAC" at 1.925,81.525 h1 r270
  text "5V PR GND" at 113.325,70.575 h0.76 r90
  text "5V AUX1 AUX2" at 113.627,54.712 h0.76 r90
  text "AUX3 AUX4 GND" at 112.037,54.671 h0.76 r90
  text "5V GND GND S4 S3 S2 S1 S0" at 111.952,25.32 h0.76 r90
  text "5V GND S5V S9 S8 S7 S6 S5" at 113.35,25.225 h0.76 r90
  text "24VDC GND" at 110.307,10.645 h0.76 r90